# Altium PCB Flyback.PcbDoc
Units mil, origin at the board's own origin, x right, y up, seen from the top; angles counter-clockwise.
Board outline 2330 x 970 mil, 2 copper layers (Top Layer, Bottom Layer); 18 components, 86 nets, 49 pads, 13 vias.
Unrouted connection lines stored in the file: 2.
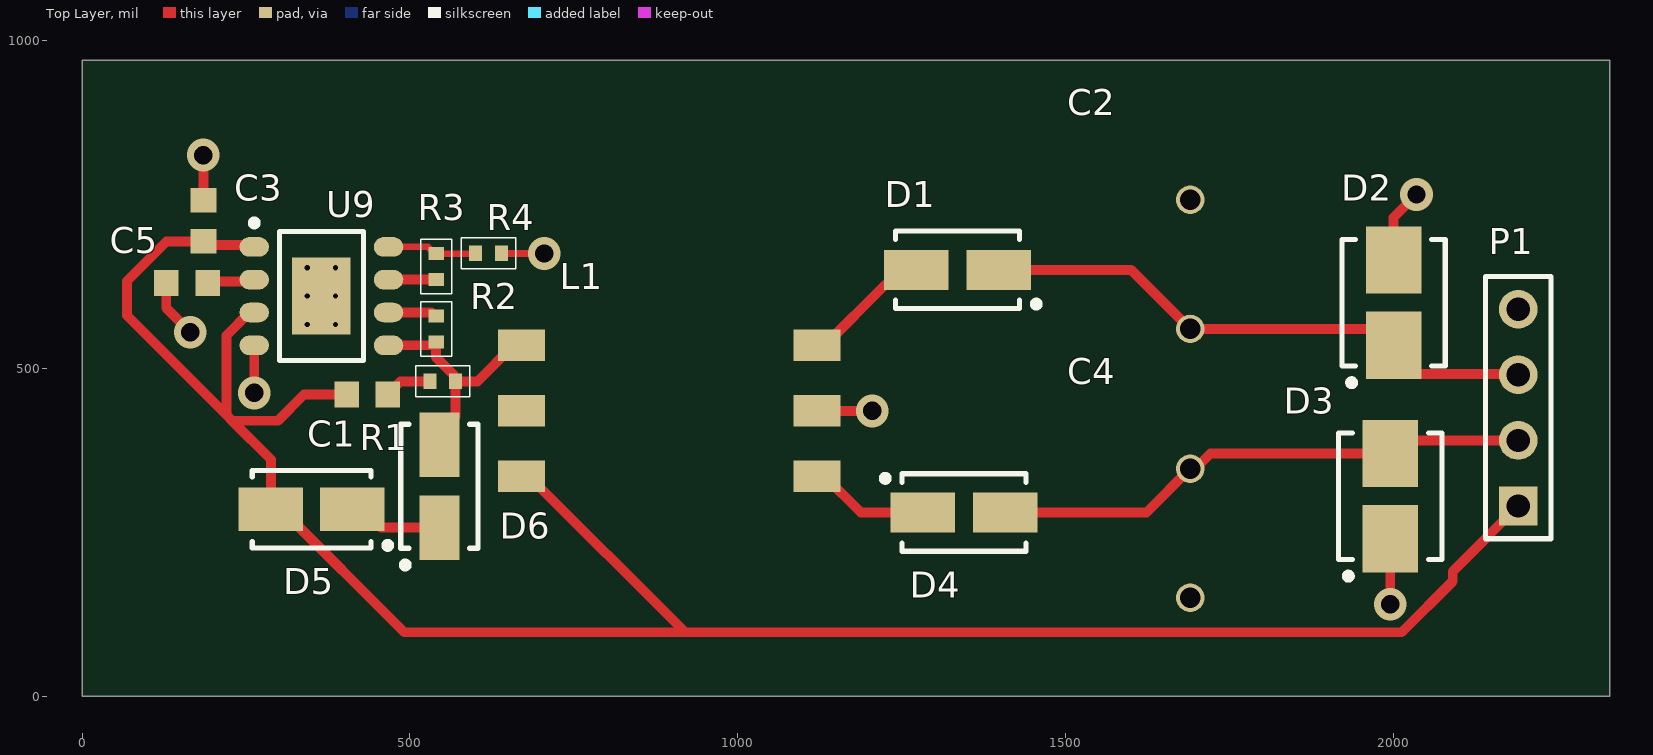
[diagram p0: Top Layer view]
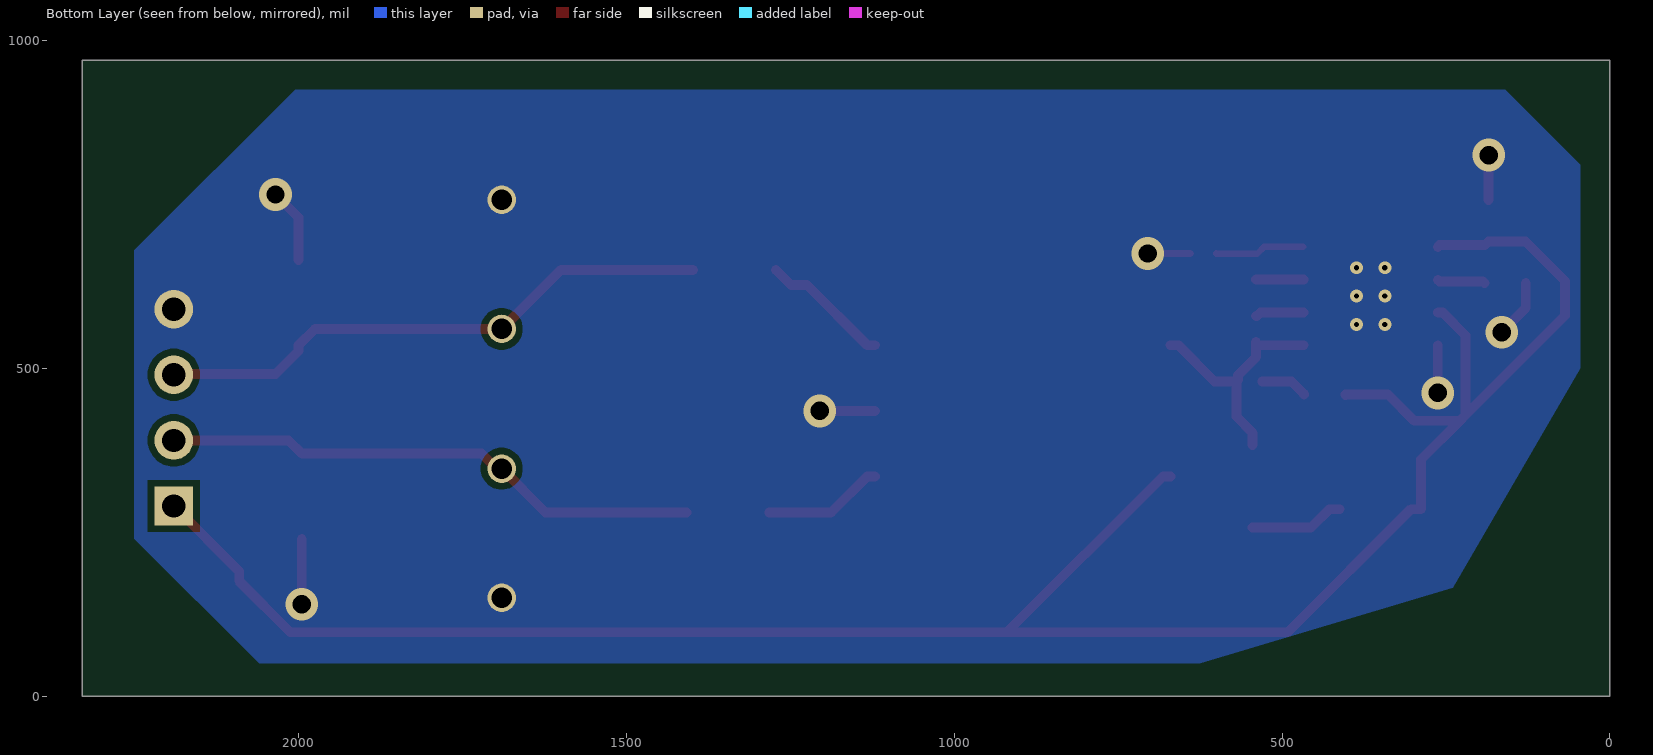
[diagram p1: Bottom Layer view, seen from below]
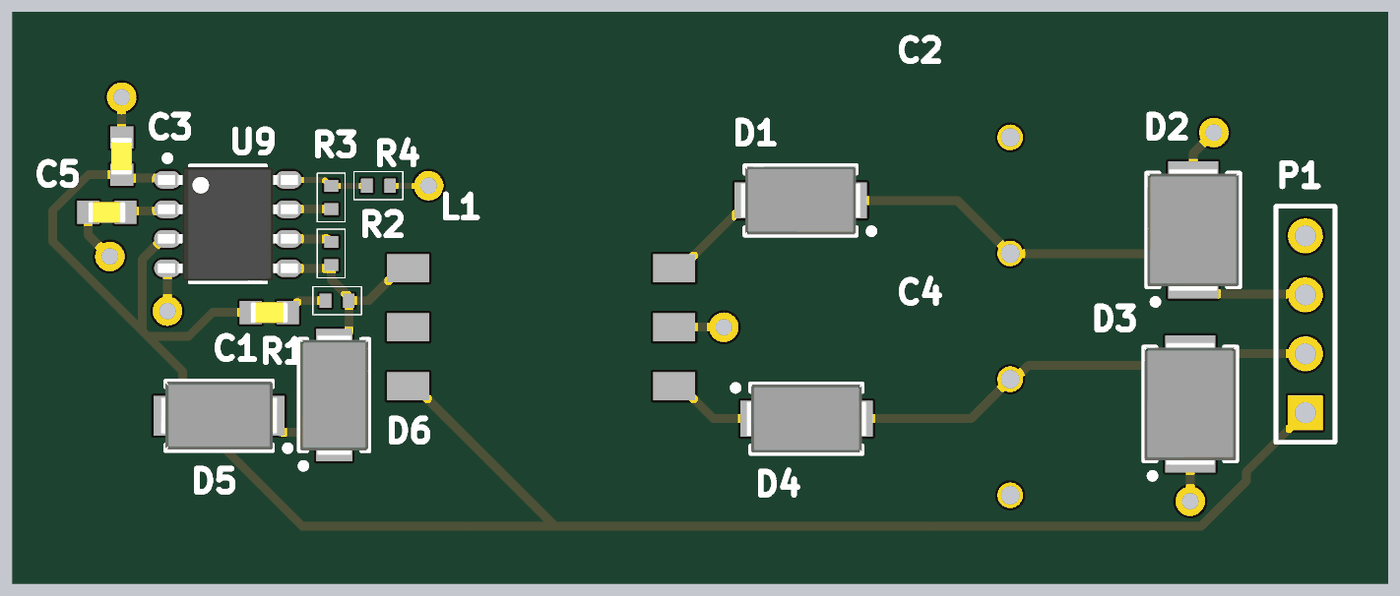
[diagram p2: 3D render of the assembled board from above, using the file's embedded part models]

## Layer stack, top to bottom
Top Solder: solder mask 0.4, Solder Resist, Dk 3.5
Top Layer: signal copper 1.4
Dielectric 1: dielectric 12.6, FR-4, Dk 4.8
Bottom Layer: signal copper 1.4
Bottom Solder: solder mask 0.4, Solder Resist, Dk 3.5

## Board outline
0,0 0,970 2330,970 2330,0

## Design rules (kind name [scope] priority, off if disabled: settings)
Clearance [All] p1: gap=10 ignorepadtopadclearanceinfootprint=FALSE except(0: Arc-Hole Track-Hole SMDPad-Hole THPad-Hole Via-Hole Fill-Hole Poly-Hole Region-Hole Text-Hole)
PlaneConnect [All] p1: planeconnectstyle=Direct reliefexpansion=20 reliefentries=4 reliefconductorwidth=10 reliefairgap=10
PolygonConnect [All] p1: connectstyle=Direct reliefconductorwidth=10 reliefentries=4 polygonreliefangle="90 Angle" airgapwidth=10
RoutingVias [All] p1: holewidth=28 width=50 viastyle="Through Hole" minholewidth=28 minwidth=50 maxholewidth=28 maxwidth=50
SolderMaskExpansion [All] p1: expansion=4 istentingtop=FALSE
Width [All] p1: maxlimit=50 minlimit=10 preferedwidth=10 bottomlayer_maxwidth=10 minimp=50.000000 maximp=50.000000 favimp=50.000000
29 further rules are at their usual default settings.

## Classes and differential pairs
component class U_Flyback: C1 C2 C3 C4 C5 D1 D2 D3 D4 D5 D6 L1 R1 R2 R3 R4 U9
channel class Small_DDS: U_Small_DDS1 U_Small_DDS2 U_Small_DDS3 U_Small_DDS4
channel class PGA_Block: U_PGA_Block1 U_PGA_Block2 U_PGA_Block3 U_PGA_Block4
channel class Current_Measure: U_Current_Measure1 U_Current_Measure2 U_Current_Measure3 U_Current_Measure4
net class Wave_In[4..1]: Wave_In1 Wave_In2 Wave_In3 Wave_In4
net class TF_LOW[4..1]: TF_LOW1 TF_LOW2 TF_LOW3 TF_LOW4
net class FROM_BRAIN[4..1]: FROM_BRAIN1 FROM_BRAIN2 FROM_BRAIN3 FROM_BRAIN4
net class DDS_OUT[4..1]: DDS_OUT1 DDS_OUT2 DDS_OUT3 DDS_OUT4
net class DDS_FSYNC[4..1]: DDS_FSYNC1 DDS_FSYNC2 DDS_FSYNC3 DDS_FSYNC4
net class CH_AMP[4..1]: CH_AMP1 CH_AMP2 CH_AMP3 CH_AMP4
net class ADC_DATA[4..1]: ADC_DATA1 ADC_DATA2 ADC_DATA3 ADC_DATA4
net class \P\G\A\_\C\S\[4..1]: \P\G\A\_\C\S\1 \P\G\A\_\C\S\2 \P\G\A\_\C\S\3 \P\G\A\_\C\S\4
component class U_MCU: *

## Components (designator, comment, footprint, x,y, rotation, side; value= is the part's Value field where it differs from the comment)
C1 "Cap" CAPC1608X05N 435,460 r180 top value=0.47u
C2 "220uF Cap" A759KR227M1VAAE024 1690,560 r0 top
C3 "Cap" CAPC1608X05N 185,725 r270 top value=10u
C4 "220uF Cap" A759KR227M1VAAE024 1690,150 r0 top
C5 "Cap" CAPC1608X05N 160,630 r0 top value=1u
D1 "Schottky 60V" "SK36A-LTP - duplicate" 1335,650 r180 top
D2 "Zener 30V" SMBJ5363B-TP 2000,600 r90 top
D3 "Zener 30V" SMBJ5363B-TP 1995,305 r90 top
D4 "Schottky 60V" "SK36A-LTP - duplicate" 1345,280 r0 top
D5 "Zener 24V" "CMZ5934B TR13 PBFREE" 350,285 r180 top
D6 "Schottky 60V" "SK36A-LTP - duplicate" 545,320 r90 top
L1 "Flyback Transformer" 750319949 670,335 r0 top
P1 "Header 4" HDR1X4 2190,290 r90 top
R1 "Res1" 0402_Res 550,480 r180 top value=39
R2 "Res1" 0402_Res 540,560 r90 top value=158k
R3 "Res1" 0402_Res 540,655 r270 top value=115k
R4 "Res1" 0402_Res 620,675 r180 top value=10k
U9 "LT8302ES8E#TRPBF" LT-S8E-8_V 365,610 r0 top

## Footprints (in the part's own frame and the unit in brackets; to place one, negate y for a bottom-side part, rotate by r counter-clockwise, add the part's x,y. Pads: shape width x height; smd on the part's side, far side on the other; paste and mask are expansions set on the pad)
0402_Res [mm]
  rect 0.5x0.6 smd: 1(-0.5,0) 2(0.5,0)
  silkscreen extent -1.05,-0.6 1.05,0.6
750319949 [mm]
  rect 1.82x1.22 smd: 1(0,5.08) 2(0,2.54) 3(0,0) 4(11.45,0) 5(11.45,2.54) 6(11.45,5.08)
  body extent 1,-1.8 10.45,6.7, height 5.5
A759KR227M1VAAE024 [mm]
  round 1.1 hole 0.8: 1(0,0) 2(0,5)
  body extent -5,-2.5 5,7.5, height 17.4
CAPC1608X05N [mm] "Chip Capacitor, 2-Leads, Body 1.55x0.85mm, IPC Medium Density"
  rect 0.95x1 smd: 1(-0.8,0) 2(0.8,0)
  body extent -0.8,-0.45 0.8,0.45, height 0.5
"CMZ5934B TR13 PBFREE" [mm]
  rect 2.5x1.7 smd: 1(-1.575,0) 2(1.575,0)
  silkscreen extent -3.08,-1.5 2.3,1.52, body extent -2.52,-1.46 2.52,1.46, height 2.62
HDR1X4 [mm] "Connector; Header; 4 Position"
  rect 1.5x1.5 hole 0.9: 1(0,0)
  round 1.5 hole 0.9: 2(2.54,0) 3(5.08,0) 4(7.62,0)
  silkscreen extent -1.27,-1.27 8.89,1.27
LT-S8E-8_V [mm] "SOIC, 8-Leads, Body 4.9x3.9mm, Pitch 1.27mm, Thermal Pad 3.25x2.26mm, Recommended"
  oval 1.143x0.76 smd: 1(-2.602,1.905) 2(-2.602,0.635) 3(-2.602,-0.635) 4(-2.602,-1.905) 5(2.601,-1.905) 6(2.601,-0.635) 7(2.601,0.635) 8(2.601,1.905)
  rect 2.26x2.99 smd: 9(0,0)
  silkscreen extent -2.73,-2.5 1.62,2.96, body extent -3.01,-2.45 3.01,2.45, height 1.75
"SK36A-LTP - duplicate" [mm] "Molded Diode, 2-Leads, Body 4.38x2.59mm, IPC Medium Density"
  rect 2.5x1.55 smd: 1(-1.6,0) 2(1.6,0)
  silkscreen extent -3.17,-1.5 2.4,1.5, body extent -2.6,-1.46 2.6,1.46, height 2.44
SMBJ5363B-TP [mm] "Molded Diode, 2-Leads, Body 4.46x3.62mm, IPC Medium Density"
  rect 2.6x2.15 smd: 1(-1.65,0) 2(1.65,0)
  silkscreen extent -3.22,-2 2.45,2, body extent -2.65,-1.97 2.65,1.97, height 2.62

## Part data
C1 C3 C5: "Capacitor", LatestRevisionDate=17-Jul-2002, LatestRevisionNote="Re-released for DXP Platform.", PackageDescription="Radial Cap, Thru-Hole; 2 Leads; 0.3 in Pin Spacing", PackageReference=RAD-0.3, Published=8-Jun-2000, Publisher="Altium Limited"
C2 C4: library part A759KR227M1VAAE024, Supplier Part Number 1=61AK1211, Supplier 1=Newark
D1 D4 D6: library part SK36A-LTP, Supplier 1="Arrow Electronics"
D2 D3: library part SMBJ5363B-TP, Supplier 1="Arrow Electronics"
D5: library part "CMZ5934B TR13 PBFREE", Supplier Part Number 1=1514-CMZ5934BTR13PBFREECT-ND, Supplier 1=DigiKey
L1: library part 750319949, Supplier Part Number 1=1297-750319949CT-ND, Supplier 1=DigiKey
P1: "Header, 4-Pin", LatestRevisionDate=17-Jul-2002, LatestRevisionNote="Re-released for DXP Platform.", Publisher="Altium Limited"
R1 R2 R3 R4: "Resistor", LatestRevisionDate=17-Jul-2002, LatestRevisionNote="Re-released for DXP Platform.", PackageDescription="Axial Device, Thru-Hole; 2 Leads; 0.3 in Pin Spacing", PackageReference=AXIAL-0.3, Published=8-Jun-2000, Publisher="Altium Limited"
U9: library part CMP-0492-02712-1, "Micropower No-Opto Isolated Flyback Converter, 2.8 to 42 V, -40 to 125 degC, 8-Pin SOIC (S8E), RoHS, Tape and Reel", Output Current="3.6 A", PartNumber=LT8302, Temperature Max="125 degC", Temperature Min="-40 degC", ComponentLink1Description="Manufacturer URL", ComponentLink1URL=http://www.linear.com/, ComponentLink2Description=Datasheet, ComponentLink2URL=http://cds.linear.com/docs/en/datasheet/8302fa.pdf, ComponentLink3Description="Package Specification", ComponentLink3URL=http://cds.linear.com/docs/en/packaging/05081857_A_S8E.pdf, DatasheetVersion="Rev. A", Mounting Technology="Surface Mount", Number Of Outputs=1, PackageDescription="8-Pin Plastic Small Outline Integrated Circuit Package, Body 4.90 x 3.90 mm, Pitch 1.27 mm", PackageVersion="Rev. A, 10/2013", Packing="Tape and Reel", RoHS=TRUE, VIN Max="42 V", VIN Min="2.8 V"

## Via types
v1: diameter 50, hole 28, Top Layer to Bottom Layer, 7 vias
v2: diameter 19.68, hole 7.87, Top Layer to Bottom Layer, 6 vias

## Nets (pads, with @x,y where several pads share a name; then routed paths per layer and width w, separated by ;. In a path a pad name is that pad's centre, name@x,y a point inside that pad or via, vN(x,y) a via of type N, cw(c..) or ccw(c..) an arc to the next point about the centre after c; other vN are vias at no path point)
1V8: 
3V3: 
3V3_A: 
5V: 
12V: C1.2 C3.2 D5.2 L1.3 P1.1 U9.1 U9.3 | length 3447.1
  Top Layer w15: C3.2@184.02,693.5 128.87,693.5 68.5,633.13 68.5,580.28 220.08,428.71 ; C3.2 190.65,687.86 259.72,687.86 U9.1 ; U9.3 255.04,585 220.08,550.04 220.08,428.71 ; C1.2@403.5,459.02 C1.2 338.68,460 298.6,419.92 228.87,419.92 ; L1.3 681.81,335 919.31,97.5 ; P1.1 2090.29,190.29 2090.29,175.18 2012.6,97.5 919.31,97.5 ; 220.08,428.71 228.87,419.92 ; 228.87,419.92 287.99,360.79 D5.2 303.74,285 491.24,97.5 919.31,97.5
30V: C2.1 D1.1 D2.1 P1.3 | length 863.5
  Top Layer w15: D1.1 1600,650 C2.1 1975.04,560 D2.1 2000,526.18 2034.82,491.36 2188.64,491.36 P1.3
-30V: C4.2 D3.2 D4.2 P1.2 | length 827.6
  Top Layer w15: D4.2 1623.15,280 C4.2 1697.66,346.85 1720.77,369.96 D3.2 2015.04,390 P1.2
\P\G\A\_\C\S\1: 
\P\G\A\_\C\S\2: 
\P\G\A\_\C\S\3: 
\P\G\A\_\C\S\4: 
\V\_\I\S\O\_\E\N\: 
\X\T\A\L\: 
ADC_CLK: 
ADC_DAT: 
ADC_DATA1: 
ADC_DATA2: 
ADC_DATA3: 
ADC_DATA4: 
AGND: 
CLK_SCL: 
CLK_SDA: 
DDS_CLK: 
DDS_FSYNC1: 
DDS_FSYNC2: 
DDS_FSYNC3: 
DDS_FSYNC4: 
DDS_IO_UPDATE: 
DDS_OUT1: 
DDS_OUT2: 
DDS_OUT3: 
DDS_OUT4: 
DDS_RX: 
DDS_SCK: 
DDS_SCLK: 
DDS_SDAT: 
DDS_TX: 
FROM_BRAIN1: 
FROM_BRAIN2: 
FROM_BRAIN3: 
FROM_BRAIN4: 
GND: C2.2 C3.1 C4.1 C5.1 D2.2 D3.1 L1.5 P1.4 R4.1 U9.4 U9.9 | length 595.3
  Top Layer w10: R4.1 v1(705,675)
  Top Layer w15: C5.1 128.5,591.5 v1(165,555) ; C3.1 v1(185,825) ; v1(262.58,462.42) U9.4 ; L1.5 v1(1205,435) ; v1(1995,140) D3.1 ; D2.2 2000,730 v1(2035,765)
  other v2: 343.35,566.69 386.65,566.69 343.35,610 386.65,610 343.35,653.31 386.65,653.31
NetC1_1: C1.1 R1.2 | length 72.7
  Top Layer w15: C1.1 466.5,460.98 485.51,480 R1.2
NetC5_2: C5.2 U9.2 | length 73.2
  Top Layer w15: C5.2 194,632.5 260.08,632.5 U9.2
NetC27_U_Small_DDS1_1: 
NetC27_U_Small_DDS2_1: 
NetC27_U_Small_DDS3_1: 
NetC27_U_Small_DDS4_1: 
NetC30_U_Small_DDS1_2: 
NetC30_U_Small_DDS2_2: 
NetC30_U_Small_DDS3_2: 
NetC30_U_Small_DDS4_2: 
NetD1_2: D1.2 L1.6 | length 198.9
  Top Layer w15: L1.6 1132.6,535 1224.59,626.99 1249,626.99 D1.2
NetD4_1: D4.1 L1.4 | length 184
  Top Layer w15: L1.4 1132.6,335 1187.6,280 D4.1
NetD5_1: D5.1 D6.1 | length 144.6
  Top Layer w15: D5.1 427.76,285 455.75,257.01 D6.1
NetR2_2: R2.2 U9.6 | length 74.8
  Top Layer w15: U9.6 532.72,585 538.03,579.69 R2.2
NetR3_2: R3.2 U9.7 | length 72.7
  Top Layer w15: U9.7 467.58,635.16 539.84,635.16 R3.2
NetU6_U_PGA_Block1_6: 
NetU6_U_PGA_Block1_7: 
OUT_V_0: 
OUT_V_1: 
OUT_V_2: 
OUT_V_3: 
PGA_SCL: 
PGA_SDA: 
STIM_0: 
STIM_1: 
STIM_2: 
STIM_3: 
SW_OUT: D6.2 L1.1 R1.1 R2.1 U9.5 | length 368.2
  Top Layer w15: U9.5 R2.1@532.72,535 ; R2.1 540,516.72 567.34,489.37 567.34,482.34 R1.1 ; D6.2 545,401.69 569.68,426.38 R1.1 ; L1.1 658.19,535 603.19,480 R1.1
TC: R3.1 R4.2 U9.8 | length 137.3
  Top Layer w10: U9.8 527.72,685 538.03,674.68 R3.1 540.16,674.84 600.16,674.84 R4.2
TF_LOW: 
TF_LOW1: 
TF_LOW2: 
TF_LOW3: 
TF_LOW4: 
VBAT: 
Wave_In1: 
Wave_In2: 
Wave_In3: 
Wave_In4: 
Wave_Out1: 
Wave_Out2: 
Wave_Out3: 
Wave_Out4: 
XTAL: 
pads on no net: L1.2

## Polygon pours and split planes (outlines as drawn)
GND on Bottom Layer "GND_L02_P000" (solid, remove dead copper, pour order 0): 160,925 45,810 45,500 240,165 625,50 785,50 2060,50 2250,240 2250,680 2005,925

## Silkscreen, mask and mechanical layers (free items; w line width, h text height)
Mechanical 1:
  the board outline again, w10